# EAGLE board single sensor (EAGLE 8.0.1)
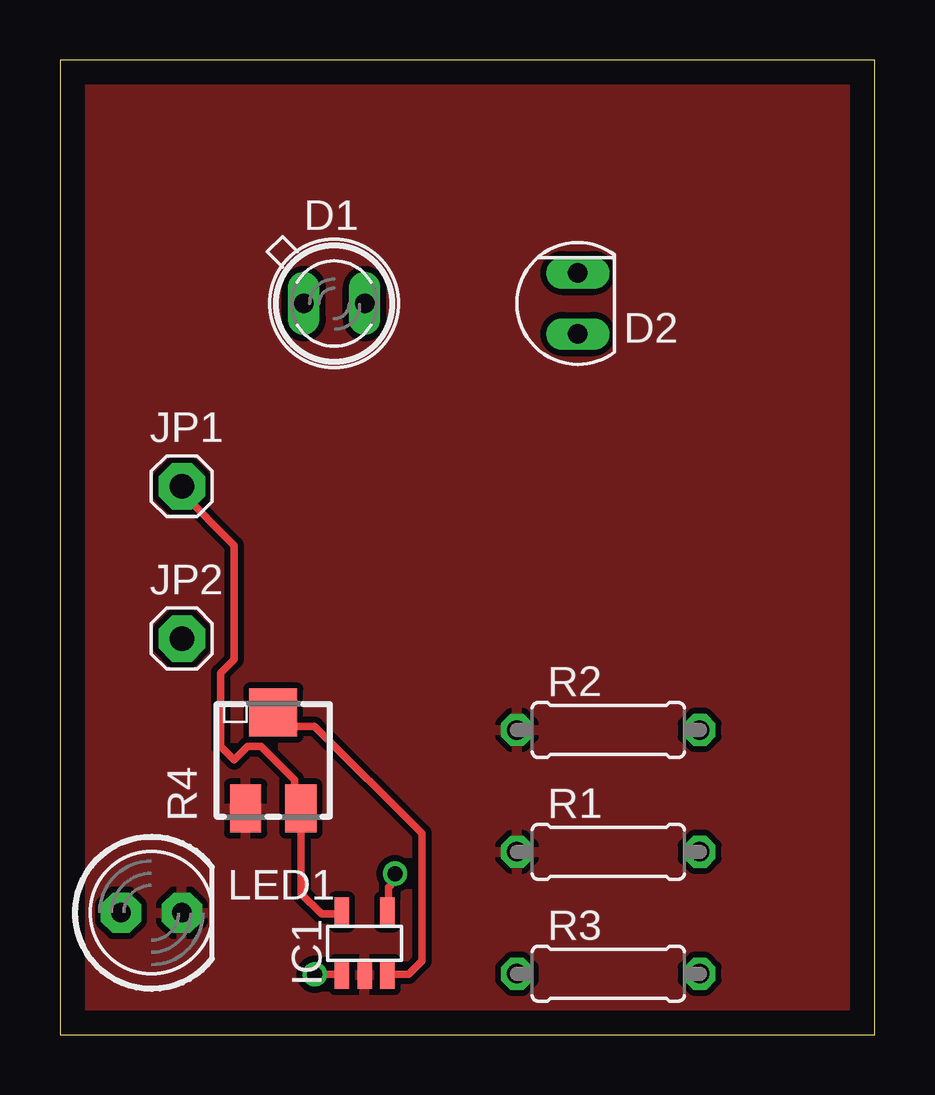
[diagram p0: board, top side]
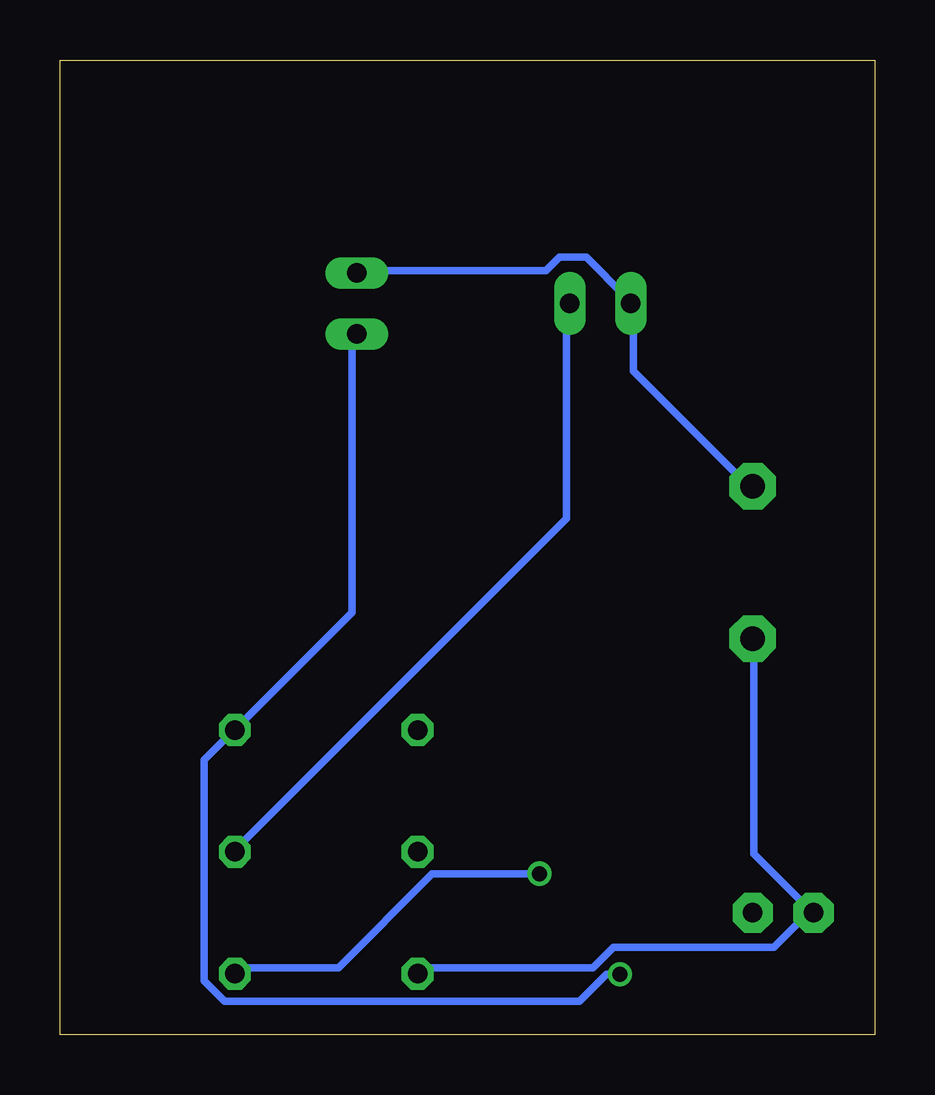
[diagram p1: board, bottom side, seen from below]

Size 33.96 x 40.63 mm. Coordinates in mm from the lower left corner, seen from the top.
Outline: 0,0 33.96,0 33.96,40.63 0,40.63 0,0
Copper layers (1*16): Top 0.035mm / dielectric 1.5mm / Bottom 0.035mm
Design rules "default": minimum track width 10mil, minimum drill 24mil, track to track 8mil, track to pad 8mil, pad to pad 8mil, via to via 8mil, smd to smd 8mil, copper to edge 40mil, drill to drill 8mil, minimum pad ring 10mil, minimum via ring 8mil, stop-mask expansion 4mil, vias tented up to drill 0mil, thermal gap 10mil
Net classes: 0 default: width 0.305 mm, drill 0.508 mm, clearance 0.254 mm

## Footprints (pad centres in the part's own frame; a part is rotated, then mirrored left to right if it is on the bottom)
SFH482 = drill 0.813 long: A -1.27,0; K 1.27,0
SFH206 = drill 0.813 long: A 0,-1.27; K 0,1.27
SOT23-5 = smd 0.6 x 1.2: 1 -0.95,-1.306; 2 0,-1.306; 3 0.95,-1.306; 4 0.95,1.306; 5 -0.95,1.306
1X01 = drill 1.016 pad 1.93 octagon: 1 0,0
LED5MM = drill 0.813 pad 1.676 octagon: A -1.27,0; K 1.27,0
0207/7 = drill 0.813 octagon: 1 -3.81,0; 2 3.81,0
RTRIM5X = smd 1.3 x 2: 1 -1.15,-2; 3 1.15,-2 | smd 2 x 2: 2 0,2

## Placement (x,y rotation side)
D1  SFH482  [SFH482]  11.43,30.48 0 top
D2  SFH206  [SFH206]  21.59,30.48 0 top
IC1  LMV321M5X  [SOT23-5]  12.7,3.81 0 top
JP1  [1X01]  5.08,22.86 0 top
JP2  [1X01]  5.08,16.51 0 top
LED1  [LED5MM]  3.81,5.08 0 top
R1  100  [0207/7]  22.86,7.62 0 top
R2  10k  [0207/7]  22.86,12.7 0 top
R3  330  [0207/7]  22.86,2.54 0 top
R4  10k  [RTRIM5X]  8.89,11.43 0 top

## Library data of the parts
D1 = led
D2 = opto-trans-siemens; MPN: SFH206K; OC_FARNELL: 1212741; OC_NEWARK: 01M8807
IC1 = linear (2)
JP1 JP2 LED1 R1-R3 = adafruit
R4 = rcl

## Nets
GND: IC1.2 LED1.K R1.1 R2.1 R4.1
N$1: D1.K R1.2
N$2: D2.A IC1.1 R2.2
N$3: IC1.3 R4.2
N$4: IC1.4 R3.2
N$5: JP2.1 LED1.A R3.1
VCC: D1.A D2.K IC1.5 JP1.1 R4.3

## Tracks (layer width: path | path; a pad name or v marks a point on that pad's centre or on a via)
GND
  pour Top: -1.27,40.64 -1.27,-2.54 35.56,-2.54 35.56,41.91 -1.27,41.91
N$1
  Bottom 0.305: D1.K 12.85,30.45 12.85,21.51 26.54,7.82 R1.2
N$2  (via drill 0.61)
  Top 0.305: v10.62,2.52 11.73,2.52 IC1.1
  Bottom 0.305: v10.62,2.52 11.18,2.52 12.29,1.4 27.1,1.4 27.94,2.23 27.94,11.46 26.82,12.57 R2.2 26.54,12.85 21.79,17.6 21.79,29.06 D2.A
N$3
  Top 0.305: IC1.3 13.69,2.52 14.53,2.52 15.09,3.07 15.09,8.38 10.62,12.85 9.5,12.85 8.94,13.41 R4.2
N$4  (via drill 0.61)
  Top 0.305: v13.97,6.71 13.97,6.43 13.69,6.15 13.69,5.31 IC1.4
  Bottom 0.305: v13.97,6.71 18.44,6.71 22.35,2.79 26.54,2.79 R3.2
N$5
  Bottom 0.305: R3.1 19,2.79 11.73,2.79 10.9,3.63 4.19,3.63 2.79,5.03 LED1.A 2.79,5.31 5.03,7.54 5.03,16.48 JP2.1
VCC
  Top 0.305: IC1.5 11.73,5.03 10.9,5.03 10.06,5.87 10.06,9.22 R4.3 9.78,9.5 9.78,10.62 8.38,12.01 7.82,12.01 7.26,11.46 6.71,12.01 6.71,15.09 7.26,15.65 7.26,20.4 5.03,22.63 JP1.1
  Bottom 0.305: JP1.1 5.31,22.91 10.06,27.66 10.06,30.45 D1.A 10.34,30.73 12.01,32.41 13.13,32.41 13.69,31.85 21.51,31.85 D2.K